# EAGLE board Shield_Kazi (EAGLE 9.5.1)
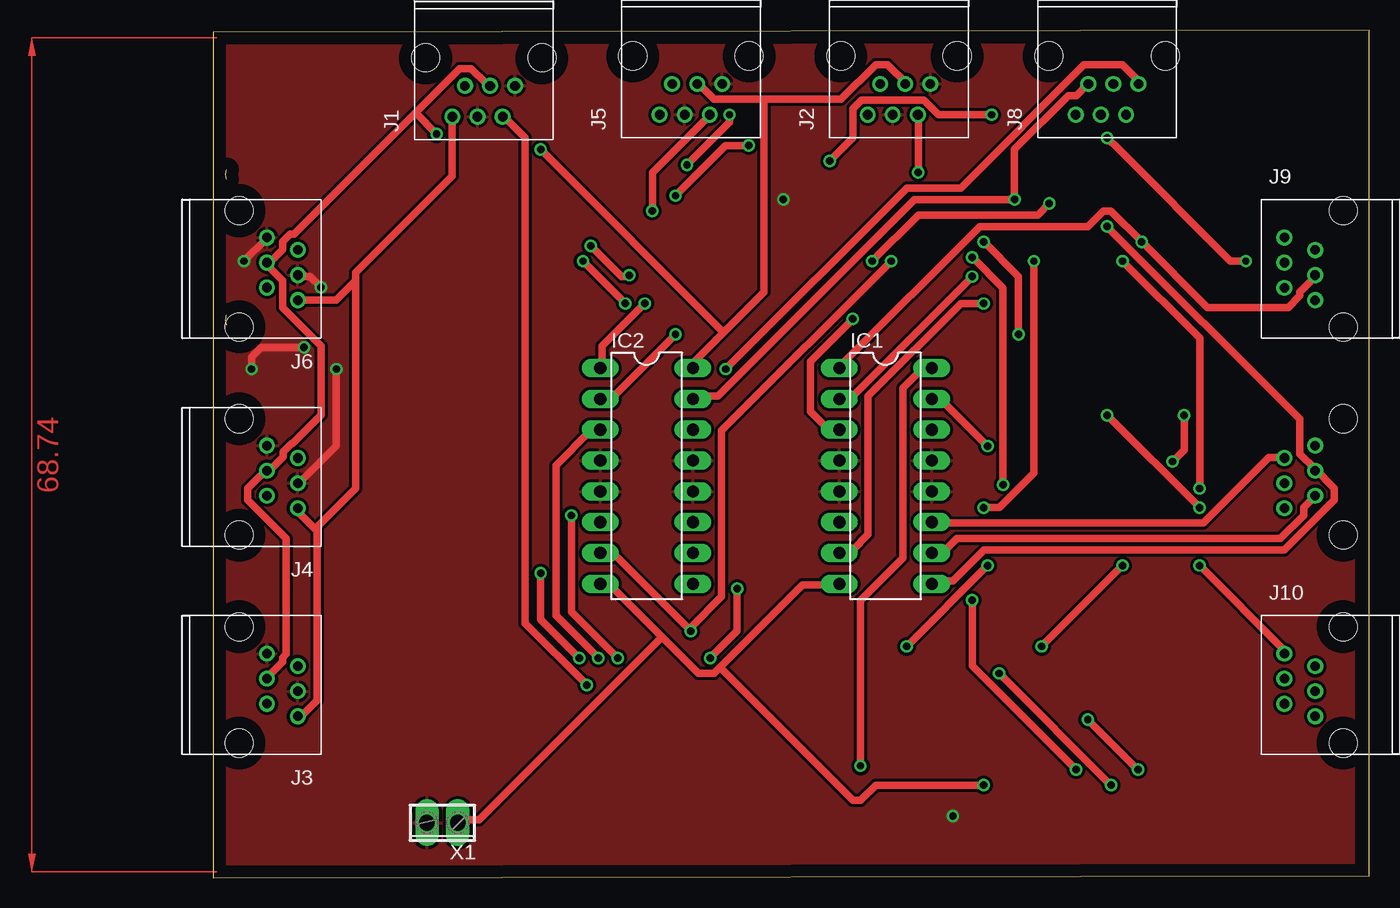
[diagram p0: board, top side]
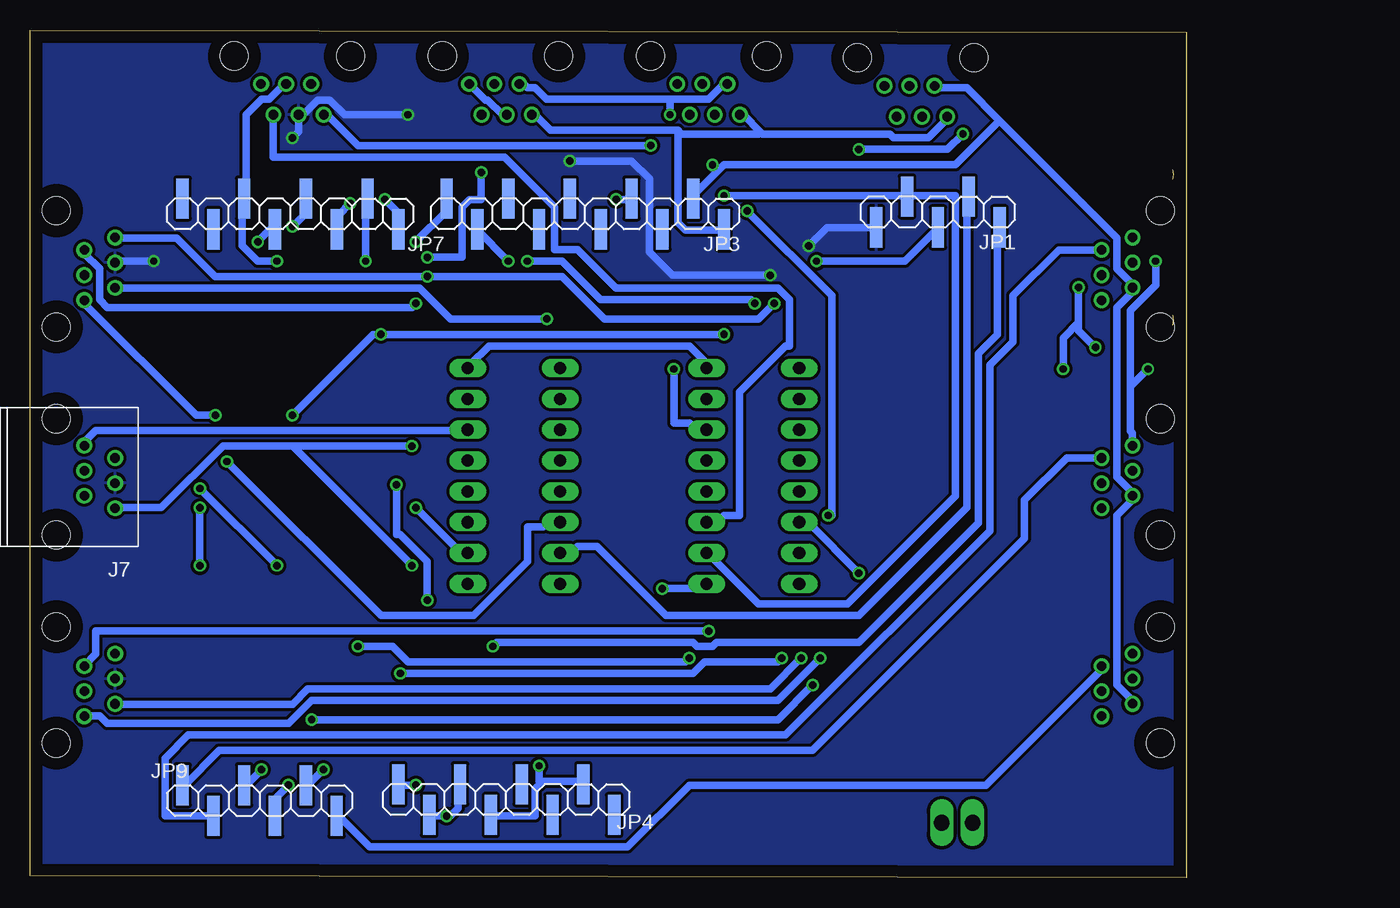
[diagram p1: board, bottom side, seen from below]

Size 95.25 x 69.82 mm. Coordinates in mm from the lower left corner, seen from the top.
Outline: 1.13,57.54 1.1,57.63 1.08,57.72 1.07,57.81 1.06,57.9 1.06,57.99 1.07,58.08 1.08,58.17 1.1,58.25 1.13,58.34
Outline: 1.13,45.54 1.12,45.59 1.1,45.63 1.09,45.67 1.08,45.72 1.07,45.81 1.06,45.9 1.06,45.99 1.07,46.08 1.08,46.17 1.1,46.25 1.13,46.34
Outline: 0,69.66 0,0 95.25,0.16 95.25,69.82 0,69.66
Copper layers (1*16): Top 0.035mm / dielectric 1.5mm / Bottom 0.035mm
Design rules "default *": minimum track width 10mil, minimum drill 24mil, track to track 10mil, track to pad 10mil, pad to pad 10mil, via to via 10mil, smd to smd 10mil, copper to edge 40mil, drill to drill 6mil, minimum pad ring 10mil, minimum via ring 8mil, stop-mask expansion 4mil, vias tented up to drill 0mil, thermal gap 10mil
Net classes: 0 default: width 0.61 mm, drill 0.61 mm, clearance 0.254 mm

## Footprints (pad centres in the part's own frame; a part is rotated, then mirrored left to right if it is on the bottom)
DIL16_KAZI = drill 1 long: 1 -8.89,-3.81; 2 -6.35,-3.81; 3 -3.81,-3.81; 4 -1.27,-3.81; 5 1.27,-3.81; 6 3.81,-3.81; 7 6.35,-3.81; 8 8.89,-3.81; 9 8.89,3.81; 10 6.35,3.81; 11 3.81,3.81; 12 1.27,3.81; 13 -1.27,3.81; 14 -3.81,3.81; 15 -6.35,3.81; 16 -8.89,3.81
RJ12_KAZI = drill 0.79: 1 -1.27,-1.558; 2 1.27,-2.58; 3 -1.27,0.516; 4 1.27,-0.516; 5 -1.27,2.58; 6 1.27,1.548 | hole 2.3: 3.572,-4.793; 3.571,4.793
1X05SMD = smd 1.016 x 3.302: 1 -1.27,1.27; 2 1.27,-1.27; 3 3.81,1.27; 4 6.35,-1.27; 5 8.89,1.27
1X10SMD = smd 1.016 x 3.302: 1 -1.27,1.27; 2 1.27,-1.27; 3 3.81,1.27; 4 6.35,-1.27; 5 8.89,1.27; 6 11.43,-1.27; 7 13.97,1.27; 8 16.51,-1.27; 9 19.05,1.27; 10 21.59,-1.27
1X08SMD = smd 1.016 x 3.302: 1 -1.27,1.27; 2 1.27,-1.27; 3 3.81,1.27; 4 6.35,-1.27; 5 8.89,1.27; 6 11.43,-1.27; 7 13.97,1.27; 8 16.51,-1.27
1X06SMD = smd 1.016 x 3.302: 1 -1.27,1.27; 2 1.27,-1.27; 3 3.81,1.27; 4 6.35,-1.27; 5 8.89,1.27; 6 11.43,-1.27
2POL254_1.3 = drill 1.3 long: 1 -1.27,0; 2 1.27,0

## Placement (x,y rotation side)
IC1  L293DDIL16_KAZI  [DIL16_KAZI]  55.4,33.1 270 top
IC2  L293DDIL16_KAZI  [DIL16_KAZI]  35.72,33.1 270 top
J1  RJ12KAZI  [RJ12_KAZI]  22.3,63.98 90 top
J2  RJ12KAZI  [RJ12_KAZI]  56.52,64.14 90 top
J3  RJ12KAZI  [RJ12_KAZI]  5.72,15.88 180 top
J4  RJ12KAZI  [RJ12_KAZI]  5.72,33.02 180 top
J5  RJ12KAZI  [RJ12_KAZI]  39.37,64.14 90 top
J6  RJ12KAZI  [RJ12_KAZI]  5.72,50.17 180 top
J7  RJ12KAZI  [RJ12_KAZI]  89.53,33.02 180 bottom
J8  RJ12KAZI  [RJ12_KAZI]  73.66,64.14 90 top
J9  RJ12KAZI  [RJ12_KAZI]  89.53,50.17 0 top
J10  RJ12KAZI  [RJ12_KAZI]  89.53,15.88 0 top
JP1  [1X05SMD]  16.67,54.85 180 bottom
JP3  [1X10SMD]  39.37,54.69 180 bottom
JP4  [1X08SMD]  48.42,6.43 180 bottom
JP7  [1X08SMD]  66.2,54.69 180 bottom
JP9  [1X06SMD]  81.44,6.35 0 bottom
X1  [2POL254_1.3]  18.89,4.52 180 top

## Library data of the parts
IC1 IC2 = st-microelectronics_KAZI
J1-J10 = con-rj
JP1 JP3 JP4 JP7 JP9 = pinhead-1
X1 = con-phoenix-254

## Nets
1_S: J4.1 JP9.1
2_S: J6.1 JP9.2
3_S: J1.1 JP9.3
4_S: J5.1 JP9.4
5_S: J2.1 JP9.5
5V: IC1.16 IC2.16 J1.4 J2.4 J3.4 J4.4 J5.4 J6.4 JP4.2 JP4.5
6_S: J3.1 JP9.6
7_S: IC2.10 J8.5 JP1.4
8_S: IC1.2 J9.5 JP1.3
GND: IC1.4 IC1.5 IC1.12 IC1.13 IC2.4 IC2.5 IC2.12 IC2.13 J1.2 J1.3 J2.2 J2.3 J3.2 J3.3 J4.2 J4.3 J5.2 J5.3 J6.2 J6.3 JP3.4 JP4.6 JP4.7 X1.2
GND_PWM: J7.3 J8.3 J9.3 J10.3 JP1.5
I2C_SCL: J1.5 J2.5 J3.5 J4.5 J5.5 J6.5 JP3.1
I2C_SDA: J1.6 J2.6 J3.6 J4.6 J5.6 J6.6 JP3.2
MISO: JP3.6
MOSI: JP3.7
MOTOR_1A: IC1.3 J9.1
MOTOR_1B: IC1.6 J9.2
MOTOR_2A: IC1.11 J7.1
MOTOR_2B: IC1.14 J7.2
MOTOR_3A: IC2.3 J10.1
MOTOR_3B: IC2.6 J10.2
MOTOR_4A: IC2.11 J8.1
MOTOR_4B: IC2.14 J8.2
PORT_9~5V: IC1.7 J9.6 JP1.2
PORT_10~5V: IC1.15 J7.5 JP1.1
PORT_11~5V: IC2.9 J8.4 JP7.6
PORT_12~5V: IC2.15 J8.6 JP7.1
PORT_13~5V: IC1.10 J7.6 JP7.2
PWM_1~5V: IC1.1 J9.4 JP7.5
PWM_2~5V: IC1.9 J7.4 JP7.4
PWM_3_5V: J10.4
PWM_3~5V: IC2.1 JP7.3
RX0: JP7.8
SCK: JP3.5
SS: JP3.8
TX0: JP7.7
VDD33: JP4.4
VIN: IC1.8 IC2.8 JP4.8 X1.1
VN_SENSOR_IN: IC2.7 J10.6 JP3.9
VP_SENSOR_IN: IC2.2 J10.5 JP3.10

## Tracks (layer width: path | path; a pad name or v marks a point on that pad's centre or on a via)
1_S
  Bottom 0.61: JP9.1 82.55,7.62 79.69,10.48 30.8,10.48 13.34,27.94 13.34,31.11 9.87,34.58 J4.1
2_S
  Bottom 0.61: JP9.2 84.14,5.08 84.14,9.84 82.23,11.75 33.02,11.75 16.19,28.57 16.19,42.23 14.29,44.13 14.29,47.94 10.51,51.72 J6.1
3_S  (via drill 0.61)
  Top 0.61: v30.8,15.88 25.72,20.96 25.72,60.96 24.13,62.55 J1.1 | v76.2,8.89 v72.07,13.02
  Bottom 0.61: v30.8,15.88 33.66,13.02 v72.07,13.02 | v76.2,8.89 77.47,7.62 JP9.3
4_S  (via drill 0.61)
  Top 0.61: v36.19,54.93 36.19,58.1 40.64,62.55 40.64,62.87 J5.1 | v29.53,29.85 29.53,21.91 v33.34,18.1 | v73.98,7.62 v64.77,16.83
  Bottom 0.61: v36.19,54.93 29.21,47.94 29.21,29.85 v29.53,29.85 | v33.34,18.1 33.66,17.78 39.69,17.78 40.64,16.83 v64.77,16.83 | v73.98,7.62 74.93,6.67 74.93,5.08 JP9.4
5_S  (via drill 0.61)
  Top 0.61: v58.1,58.1 58.1,62.87 J2.1 | v62.55,51.12 65.09,48.58 v65.09,32.39 | v62.55,22.86 62.55,17.46 v71.12,8.89
  Bottom 0.61: v58.1,58.1 58.1,55.88 59.06,55.88 59.69,55.25 59.69,51.12 v62.55,51.12 | v65.09,32.39 65.09,28.26 64.77,28.26 62.55,26.04 v62.55,22.86 | v71.12,8.89 72.39,7.62 JP9.5
5V  (via drill 0.61)
  Top 0.61: J3.4 4.45,16.51 5.72,17.78 5.72,18.1 6.03,18.42 6.03,27.94 2.86,31.11 2.86,32.07 4.45,33.66 J4.4 4.45,33.34 5.78,34.67 5.78,35.08 6.48,35.78 6.58,35.78 8.89,38.1 8.89,43.81 5.72,46.99 5.72,49.21 4.45,50.48 | 16.67,63.02 6.67,53.02 6.35,53.02 5.72,52.39 5.72,51.75 4.45,50.48 | 16.67,63.02 20.32,66.68 21.27,66.68 22.54,65.41 J1.4 | 4.45,50.48 J6.4 | 45.4,64.14 51.75,64.14 54.61,66.99 55.56,66.99 57.15,65.41 J2.4 | 45.4,64.14 41.28,64.14 40,65.41 J5.4 | v53.34,9.21 53.34,22.86 56.83,26.35 56.83,40.32 58.42,41.91 59.06,41.91 IC1.16 | 45.4,64.14 45.4,48.26 42.07,44.93 | 42.07,44.93 39.37,42.23 IC2.16 | v18.41,61.28 16.67,63.02 | 42.07,44.93 v26.99,60.01
  Bottom 0.61: 53.18,7.78 53.66,7.3 53.66,5.08 57.15,5.08 JP4.5 | 53.18,7.78 53.02,7.94 49.85,7.94 JP4.2 | IC1.16 59.06,42.23 57.47,43.81 40.96,43.81 39.37,42.23 IC2.16 | v53.34,9.21 53.34,7.94 53.18,7.78 | v18.41,61.28 19.69,60.01 v26.99,60.01
6_S
  Bottom 0.61: J3.1 6.98,17.14 16.51,7.62 40.96,7.62 46.04,2.54 67.31,2.54 69.85,5.08 JP9.6
7_S  (via drill 0.61)
  Top 0.61: v44.13,60.33 42.23,60.33 v38.1,56.2
  Bottom 0.61: v44.13,60.33 68.26,60.33 70.8,62.87 J8.5 | v38.1,56.2 23.18,56.2 JP1.4 22.86,56.2 19.05,56.2 19.05,31.43 27.94,22.54 35.24,22.54 39.37,26.67 IC2.10
8_S  (via drill 0.61)
  Top 0.61: v62.55,49.53 52.7,39.69 51.75,39.69 IC1.2 | v33.97,47.31 v30.48,50.8
  Bottom 0.61: J9.5 88.27,52.7 83.19,52.7 80.01,49.53 v62.55,49.53 51.44,49.53 47.94,46.04 35.24,46.04 v33.97,47.31 | v30.48,50.8 23.18,50.8 20.64,53.34 JP1.3
GND  (via drill 0.61)
  Top 0.61: 2.54,50.84 v2.54,50.8 4.45,52.7 J6.2 | J6.3 7.5,49.65 7.62,49.53 8.01,49.53 v8.89,48.65 | v7.5,43.7 3.96,43.7 3.17,42.91 v3.17,41.91 | J4.3 7.1,32.5 10.16,35.56 v10.16,41.91
  Bottom 0.61: JP4.7 62.23,5.08 v60.96,5.08 60.64,5.08 60.01,5.71 60.01,7.62 JP4.6 | v46.99,55.88 45.72,55.88 JP3.4 | J4.2 4.45,36.62 4.62,36.79 4.62,40.47 | 4.62,40.47 4.62,46.74 2.54,48.81 v2.54,50.8 | v3.17,41.91 4.62,40.47 | v8.89,48.65 8.89,45.72 | 8.89,45.72 8.89,45.09 v7.5,43.7 | v10.16,41.91 10.16,44.45 8.89,45.72 | J2.2 57.76,64.07 57.57,64.07 56.36,62.87 J2.3
  pour Top: 0.4,68.98 0.4,0.48 94.06,0.48 94.06,68.98
GND_PWM  (via drill 0.61)
  Top 0.61: v73.66,60.96 74.61,60.01 83.82,50.8 v85.09,50.8 | v31.12,52.07 33.66,49.53 34.29,49.53 v34.29,49.64 | v64.14,62.87 59.78,62.87 58.57,64.07 53.44,64.07 52.73,63.37 52.73,60.98 v50.8,59.06
  Bottom 0.61: v73.66,60.96 73.14,61.48 J8.3 72.79,62.87 71.58,64.07 70.58,64.07 69.37,62.87 v64.14,62.87 | v85.09,50.8 88.15,50.8 J9.3 | JP1.5 29.61,53.58 v31.12,52.07 | v34.29,49.64 42.35,49.64 44.25,51.54 44.25,57.58 45.72,59.06 v50.8,59.06
  pour Bottom: 1.11,69.06 1.11,0.79 94.93,0.79 94.93,69.06
I2C_SCL
  Top 0.61: 8.41,28.73 6.98,30.16 J4.5 | 8.41,28.73 8.57,28.57 8.57,14.61 7.3,13.34 6.98,13.34 J3.5 | J1.5 19.69,62.55 19.69,57.79 11.75,49.85 11.75,49.21 | 8.41,28.73 11.75,32.07 11.75,49.21 | J6.5 10.12,47.59 11.75,49.21
  Bottom 0.61: 35.08,61.44 34.92,61.28 24.45,61.28 24.13,60.96 21.27,60.96 19.69,62.55 J1.5 | 35.08,61.44 36.51,62.87 J5.5 | 41.75,61.44 41.59,61.28 35.24,61.28 35.08,61.44 | 41.75,61.44 41.91,61.59 52.39,61.59 53.66,62.87 J2.5 | JP3.1 38.1,53.34 41.28,53.34 41.91,53.98 41.91,61.28 41.75,61.44
I2C_SDA  (via drill 0.61)
  Top 0.61: v42.55,62.87 42.55,62.23 v39.05,58.74
  Bottom 0.61: 42.55,64.14 52.7,64.14 53.66,65.09 54.29,65.09 54.61,65.41 J2.6 | 42.55,64.14 39.37,64.14 38.1,65.41 J5.6 | J3.6 4.45,14.61 5.72,15.88 5.72,29.85 4.45,31.11 J4.6 4.45,31.75 5.72,33.02 5.72,46.99 4.45,48.26 J6.6 4.45,48.9 5.72,50.17 5.72,52.7 15.4,62.39 | 15.4,62.39 18.1,65.09 20.64,65.09 J1.6 | 38.58,58.26 38.1,58.74 19.05,58.74 15.4,62.39 | 38.58,58.26 40.64,56.2 JP3.2 | v42.55,62.87 42.55,64.14 | 38.58,58.26 v39.05,58.74
MOTOR_1A  (via drill 0.61)
  Top 0.61: v52.7,46.04 49.21,42.55 49.21,38.42 50.48,37.15 51.44,37.15 IC1.3
  Bottom 0.61: v52.7,46.04 60.64,46.04 63.18,48.58 88.27,48.58 J9.1
MOTOR_1B  (via drill 0.61)
  Top 0.61: v80.01,38.1 80.01,35.24 v79.06,34.29
  Bottom 0.61: v80.01,38.1 81.6,38.1 90.81,47.31 J9.2 | v79.06,34.29 66.36,21.59 58.74,21.59 54.29,26.04 54.29,28.89 53.02,28.89 52.7,29.21 51.75,29.21 IC1.6
MOTOR_2A
  Top 0.61: J7.1 88.27,34.61 87,34.61 81.6,29.21 59.37,29.21 IC1.11
MOTOR_2B
  Bottom 0.61: J7.2 90.81,35.88 89.85,36.83 59.37,36.83 IC1.14
MOTOR_3A  (via drill 0.61)
  Top 0.61: v31.75,18.1 28.26,21.59 28.26,33.97 31.12,36.83 31.75,36.83 IC2.3
  Bottom 0.61: v31.75,18.1 34.29,15.56 72.39,15.56 73.66,14.29 88.27,14.29 J10.1
MOTOR_3B  (via drill 0.61)
  Top 0.61: v30.16,18.1 26.99,21.27 v26.99,25.08
  Bottom 0.61: v30.16,18.1 33.66,14.61 72.07,14.61 73.98,12.7 88.9,12.7 89.53,13.34 90.81,13.34 J10.2 | v26.99,25.08 31.12,29.21 31.75,29.21 IC2.6
MOTOR_4A
  Bottom 0.61: J8.1 75.25,62.87 75.25,59.37 56.2,59.37 52.07,55.25 52.07,51.75 50.17,51.75 46.99,48.58 33.66,48.58 32.7,47.62 32.7,43.81 33.02,43.81 36.83,40.01 36.83,29.85 38.1,29.85 38.42,29.53 39.37,29.53 IC2.11
MOTOR_4B  (via drill 0.61)
  Top 0.61: v42.23,41.91 57.15,56.83 61.59,56.83 71.75,66.99 74.93,66.99 76.2,65.72 76.2,65.41 J8.2
  Bottom 0.61: v42.23,41.91 42.23,37.47 40.96,37.47 40.64,37.15 39.69,37.15 IC2.14
PORT_9~5V  (via drill 0.61)
  Top 0.61: v63.5,47.31 61.59,47.31 53.97,39.69 53.97,28.26 52.7,26.99 51.75,26.99 IC1.7
  Bottom 0.61: v63.5,47.31 63.82,46.99 88.9,46.99 89.53,47.62 89.53,50.17 90.81,51.44 J9.6 | JP1.2 18.1,55.88 18.1,30.48 26.99,21.59 42.86,21.59 48.58,27.31 50.17,27.31 50.48,26.99 51.44,26.99 IC1.7
PORT_10~5V  (via drill 0.61)
  Top 0.61: v63.82,35.56 60.01,39.37 59.37,39.37 IC1.15 | v63.82,25.72 v57.15,19.05
  Bottom 0.61: v63.82,35.56 73.66,35.56 | 73.66,35.56 79.38,35.56 84.45,30.48 88.27,30.48 J7.5 | v57.15,19.05 56.83,19.37 40.64,19.37 40.32,19.05 39.05,19.05 38.73,19.37 26.99,19.37 17.15,29.21 17.15,29.85 17.15,43.18 15.56,44.77 15.56,53.34 JP1.1 | 73.66,35.56 v63.82,25.72
PORT_11~5V  (via drill 0.61)
  Top 0.61: v43.18,23.81 43.18,20.32 v40.96,18.1 | v74.93,25.72 v68.26,19.05 | v81.28,32.07 81.28,44.45 v74.93,50.8
  Bottom 0.61: J8.4 74.3,65.41 75.56,64.14 76.2,64.14 77.47,62.87 77.47,56.2 JP7.6 77.79,55.88 77.79,52.07 76.52,50.8 v74.93,50.8 | v43.18,23.81 40,23.81 39.69,24.13 IC2.9 | v40.96,18.1 41.28,17.78 64.14,17.78 65.41,19.05 v68.26,19.05 | v81.28,32.07 v74.93,25.72
PORT_12~5V  (via drill 0.61)
  Top 0.61: J8.6 72.07,65.41 71.12,64.45 70.48,64.45 66.04,60.01 v66.04,55.88 57.78,55.88 41.59,39.69 39.69,39.69 IC2.15
  Bottom 0.61: v66.04,55.88 65.09,54.93 65.09,53.66 JP7.1
PORT_13~5V  (via drill 0.61)
  Top 0.61: J7.6 90.81,31.43 89.85,30.48 89.85,29.85 87.95,27.94 61.28,27.94 60.33,26.99 59.37,26.99 IC1.10 | v67.63,50.8 67.63,33.34 64.77,30.48 v63.5,30.48
  Bottom 0.61: v67.63,50.8 67.63,55.88 JP7.2 | v63.5,30.48 60.01,26.99 59.37,26.99 IC1.10
PWM_1~5V  (via drill 0.61)
  Top 0.61: J9.4 90.81,49.53 89.53,48.26 89.53,47.94 88.58,46.99 81.92,46.99 v76.52,52.39 73.98,54.93 73.34,54.93 72.07,53.66 63.18,53.66 51.75,42.23 IC1.1
  Bottom 0.61: v76.52,52.39 75.56,53.34 75.25,53.34 JP7.5
PWM_2~5V  (via drill 0.61)
  Top 0.61: 90.81,33.66 89.53,34.92 89.53,37.78 v73.66,53.66 | 90.81,33.66 92.39,32.07 92.39,31.11 88.27,26.99 63.5,26.99 60.96,24.45 59.37,24.45 IC1.9 | 90.81,33.66 J7.4
  Bottom 0.61: v73.66,53.66 72.71,54.61 72.71,55.88 JP7.4
PWM_3~5V  (via drill 0.61)
  Top 0.61: v35.56,47.31 32.07,43.81 32.07,42.23 IC2.1 | v54.29,50.8 58.1,54.61 67.94,54.61 v68.9,55.56
  Bottom 0.61: v35.56,47.31 35.88,47.62 48.26,47.62 51.44,50.8 v54.29,50.8 | v68.9,55.56 69.85,54.61 69.85,53.66 JP7.3
VIN  (via drill 0.61)
  Top 0.61: 41.75,17.3 41.28,16.83 40,16.83 36.99,19.84 | 41.75,17.3 48.58,24.13 51.44,24.13 IC1.8 | 36.99,19.84 32.7,24.13 32.07,24.13 IC2.8 | v63.5,7.62 54.61,7.62 53.34,6.35 52.7,6.35 41.75,17.3 | 36.99,19.84 21.91,4.76 20.32,4.76 X1.1
  Bottom 0.61: v63.5,7.62 64.77,7.62 JP4.8
VN_SENSOR_IN  (via drill 0.61)
  Top 0.61: IC2.7 32.07,26.67 33.02,26.67 v39.37,20.32 39.37,20.64 41.91,23.18 41.91,36.83 v55.88,50.8
  Bottom 0.61: v39.37,20.32 89.85,20.32 89.85,18.42 90.81,17.46 J10.6 | v55.88,50.8 58.42,53.34 JP3.9
VP_SENSOR_IN  (via drill 0.61)
  Top 0.61: v81.28,25.72 88.27,18.73 J10.5 | v73.66,38.1 v81.28,30.48 | v66.36,44.77 66.36,49.53 v63.5,52.39 | v38.1,44.77 33.02,39.69 32.07,39.69 IC2.2
  Bottom 0.61: v81.28,30.48 v81.28,25.72 | v73.66,38.1 66.99,44.77 v66.36,44.77 v38.1,44.77 | v63.5,52.39 60.96,54.93 JP3.10
(copper drawn outside any net)
  shapes: Top area x1